# Altium PCB BUCK_PCB.PcbDoc
Units mm, origin at the board's own origin, x right, y up, seen from the top; angles counter-clockwise.
Board outline 37.2 x 20.8 mm, 2 copper layers (Top Layer, Bottom Layer); 14 components, 8 nets, 34 pads, 5 vias.
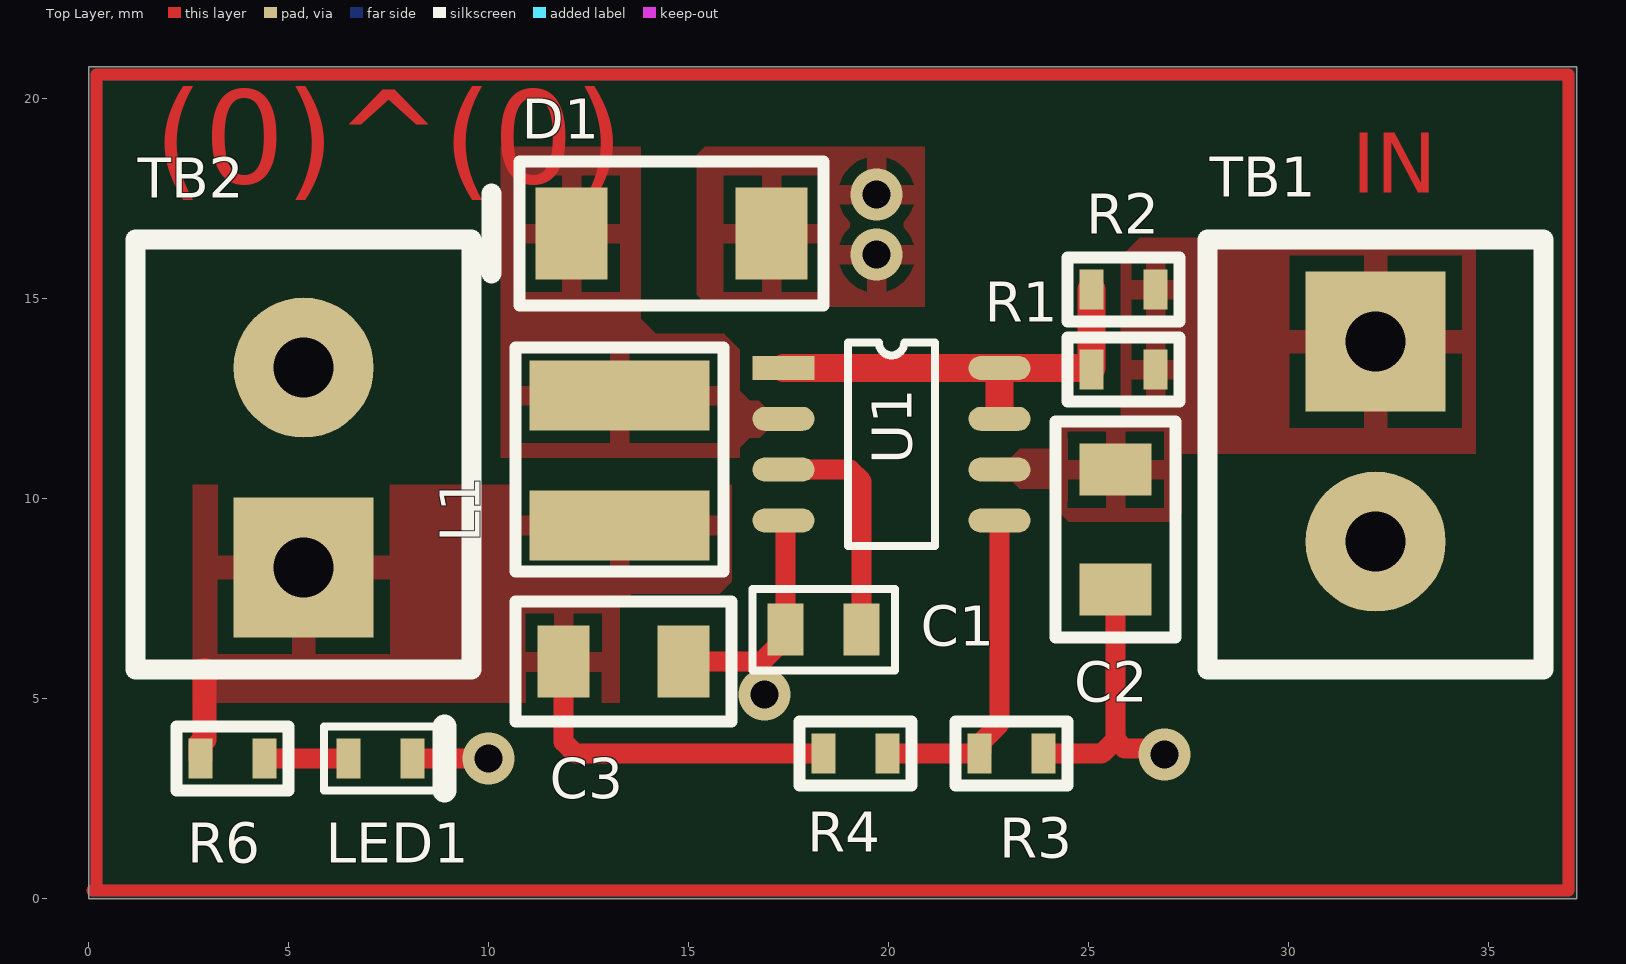
[diagram p0: Top Layer view]
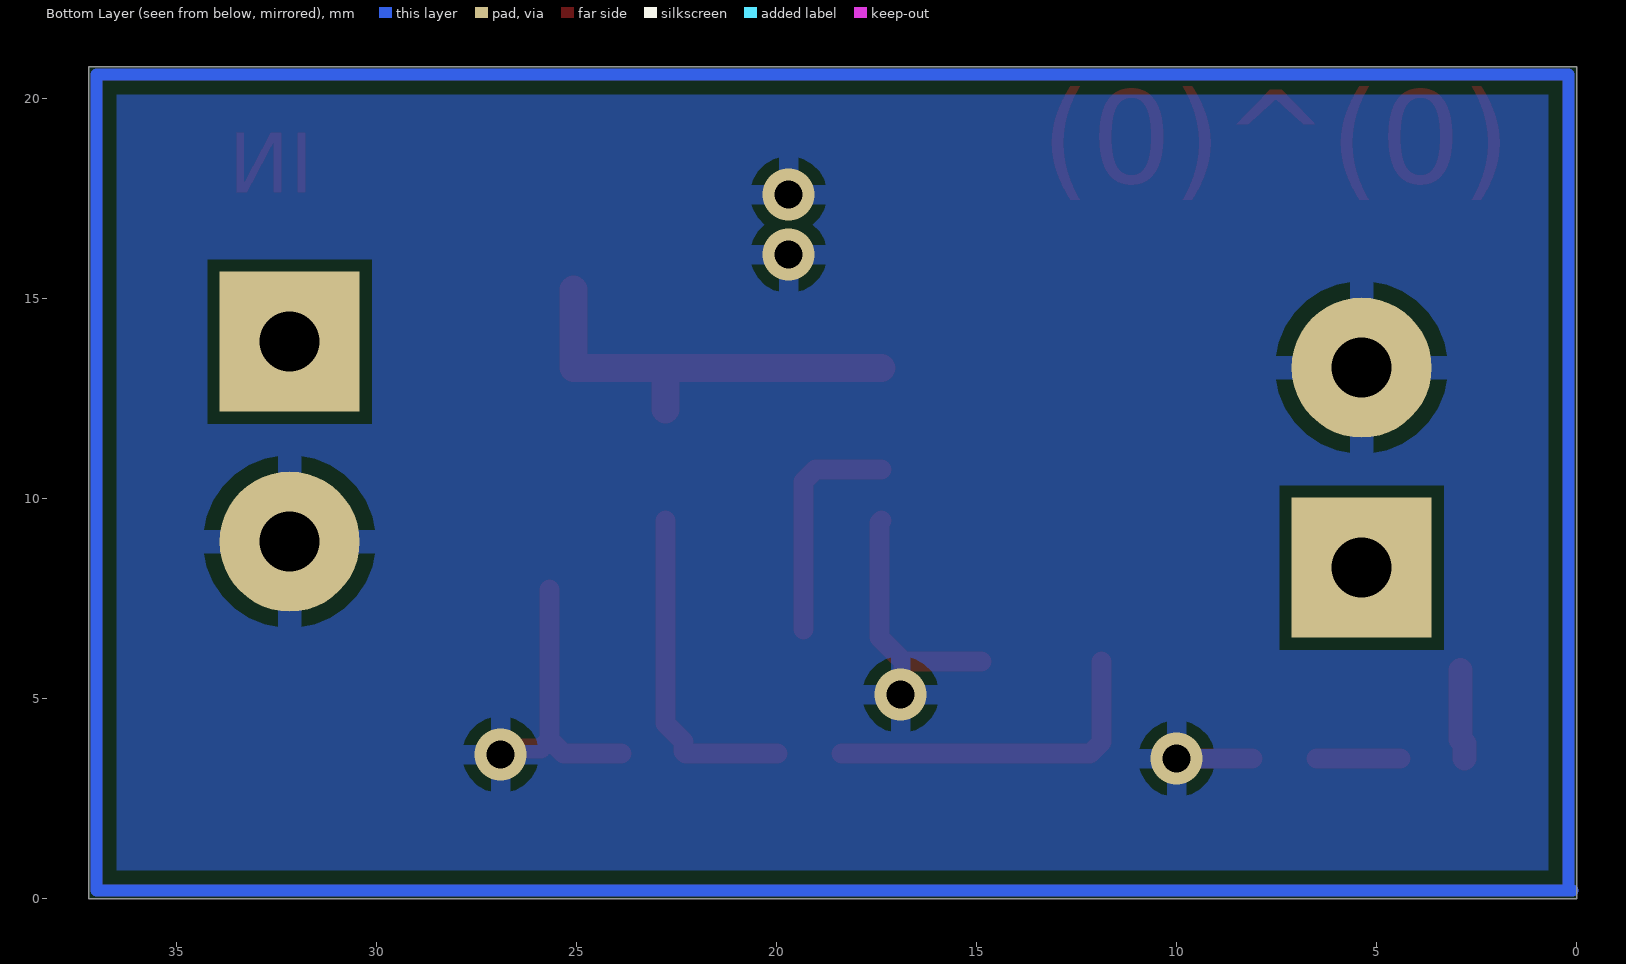
[diagram p1: Bottom Layer view, seen from below]
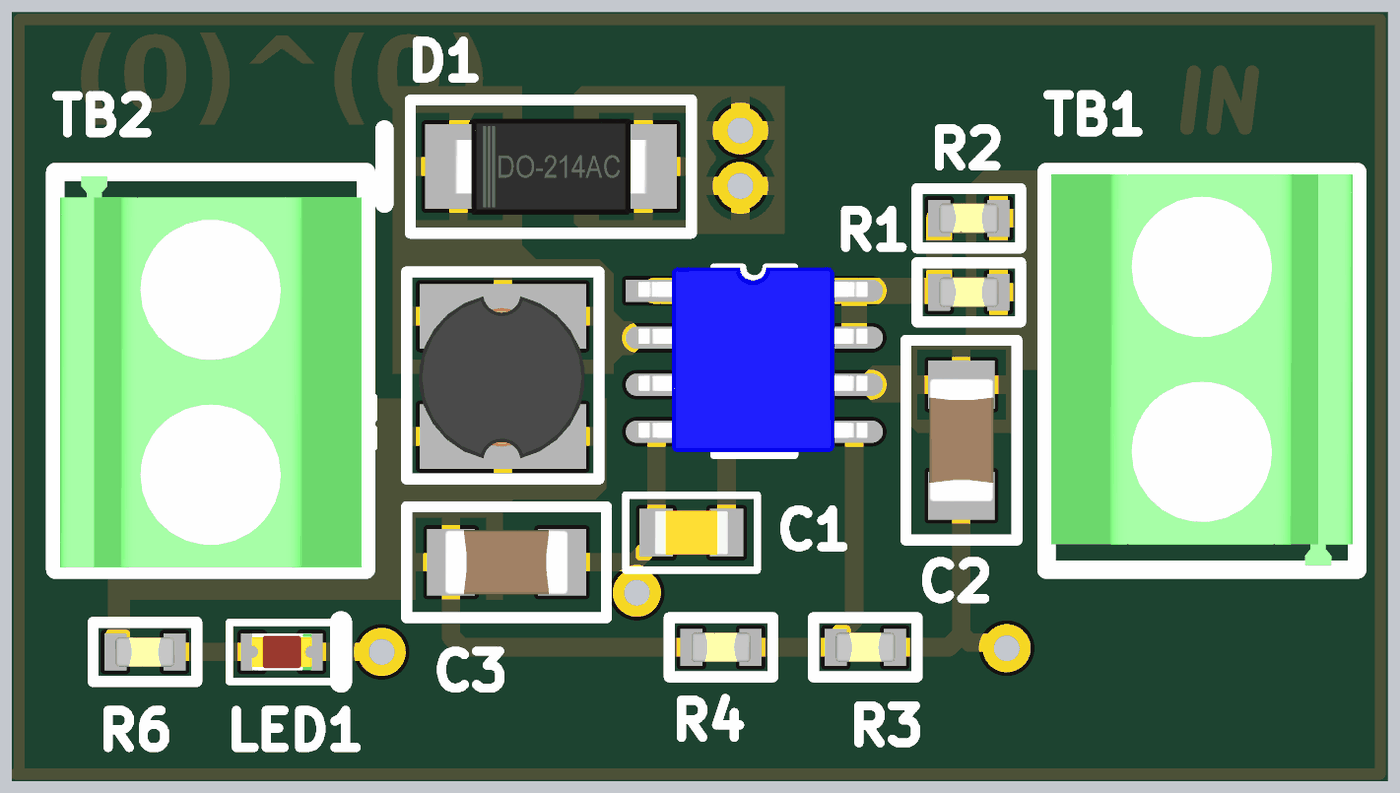
[diagram p2: 3D render of the assembled board from above, using the file's embedded part models]

## Layer stack, top to bottom
Top Solder: solder mask 0.0102, Solder Resist, Dk 3.5
Top Layer: signal copper 0.0356
Dielectric 1: dielectric 0.32, FR-4, Dk 4.8
Bottom Layer: signal copper 0.0356
Bottom Solder: solder mask 0.0102, Solder Resist, Dk 3.5

## Board outline
0,0 37.2,0 37.2,20.8 0,20.8

## Design rules (kind name [scope] priority, off if disabled: settings)
BoardOutlineClearance [All] p1: gap=0.7 ignorepadtopadclearanceinfootprint=FALSE
Clearance [All] p1: gap=0.3 ignorepadtopadclearanceinfootprint=FALSE
PolygonConnect [All] p1: thpad.connectstyle=Relief thpad.reliefconductorwidth=0.6 thpad.reliefentries=4 thpad.polygonreliefangle="90 Angle" thpad.airgapwidth=0.4 smdpad.connectstyle=Relief smdpad.reliefconductorwidth=0.5 smdpad.reliefentries=4 smdpad.polygonreliefangle="90 Angle" smdpad.airgapwidth=0.3 via.connectstyle=Relief via.reliefconductorwidth=0.5 via.reliefentries=4 via.polygonreliefangle="90 Angle" via.airgapwidth=0.3
RoutingVias [All] p1: holewidth=0.7 width=1.3 viastyle="Through Hole" minholewidth=0.6 minwidth=1.2 maxholewidth=0.8 maxwidth=1.4
SolderMaskExpansion [All] p1: expansion=0.102 istentingtop=FALSE
Width [All] p1: maxlimit=3 minlimit=0.4 preferedwidth=0.7
30 further rules are at their usual default settings.

## Components (designator, comment, footprint, x,y, rotation, side; value= is the part's Value field where it differs from the comment)
C1 "0805_C" "C0805 - 0.1uf" 18.375,6.725 r0 top
C2 "1206_C" 1206 25.675,9.225 r90 top
C3 "1206_C" 1206 13.375,5.925 r180 top
D1 "1N5819" D0-214AC 12.075,16.625 r0 top
L1 "CD43_100uH" CD43 13.275,12.575 r180 top
LED1 "0603_Red" 0603_LED 6.5,3.5 r0 top
R1 "0603_R68" 0603_CAP 26.675,13.225 r180 top
R2 "0603_R68" 0603_CAP 26.675,15.225 r180 top
R3 "0603_R" 0603_CAP 23.875,3.625 r180 top
R4 "0603_R" 0603_CAP 19.975,3.625 r180 top
R6 "0603_R" 0603_CAP 4.4,3.5 r180 top
TB1 "TERM 1x2 5mm" Terminal_5mm 32.175,11.425 r0 top
TB2 "TERM 1x2 5mm" Terminal_5mm 5.375,10.775 r180 top
U1 "Buck Conv." SOP8 17.375,13.265 r0 top

## Footprints (in the part's own frame and the unit in brackets; to place one, negate y for a bottom-side part, rotate by r counter-clockwise, add the part's x,y. Pads: shape width x height; smd on the part's side, far side on the other; paste and mask are expansions set on the pad)
0603_CAP [mm]
  rect 0.6x1 smd: 1(0,0) 2(1.6,0)
  silkscreen extent -0.6,-0.8 2.2,0.8, body extent 0,-0.4 1.6,0.4, height 0.81
0603_LED [mm]
  rect 0.6x1 smd: 1(0,0) 2(1.6,0)
  silkscreen extent -0.62,-0.8 2.4,0.8, body extent -0.01,-0.5 1.61,0.5, height 0.98
1206 [mm]
  rect 1.3x1.8 smd: 1(-1.5,0) 2(1.5,0)
  silkscreen extent -2.7,-1.5 2.7,1.5, body extent -1.67,-0.87 1.68,0.87, height 1
"C0805 - 0.1uf" [mm]
  rect 0.9x1.3 smd: 1(-0.95,0) 2(0.95,0)
  silkscreen extent -1.78,-1.02 1.78,1.02, body extent -1,-0.6 1,0.6, height 0.96
CD43 [mm]
  rect 4.5x1.75 smd: 1(0,0) 2(0,3.25)
  silkscreen extent -2.6,-1.2 2.6,4.4, body extent -2.22,-0.54 2.28,3.84, height 3.21
D0-214AC [mm]
  rect 1.8x2.3 smd: A(5,0) K(0,0)
  silkscreen extent -2,-1.8 6.3,1.8, body extent -0.1,-1.3 5.1,1.3, height 2.31
SOP8 [mm]
  rect 1.55x0.6 smd: 1(0,0)
  oval 1.55x0.6 smd: 2(0,-1.27) 3(0,-2.54) 4(0,-3.81) 5(5.4,-3.81) 6(5.4,-2.54) 7(5.4,-1.27) 8(5.4,0)
  silkscreen extent 1.61,-4.44 3.79,0.64, body extent -0.43,-4.37 5.77,0.64, height 1.62
Terminal_5mm [mm]
  rect 3.5x3.5 hole 1.5: 1(0,2.5)
  round 3.5 hole 1.5: 2(0,-2.5)
  silkscreen extent -4.2,-5.7 4.2,5.05, body extent -4.08,-5.58 4.07,4.98, height 10.01

## Part data
C1: library part "0805 Capacitor", "0805 Capacitor"
C2 C3: library part "1206 Capacitor", "1206 Capacitor"
D1: "1N5819 SS14 SMA Schottky Barrier Diodes (SBD) 40V 550mV@1A 1A"
L1: library part "100uH 4.5x4x3.2mm"
LED1: library part 0603LED
R1 R2 R3 R4 R6: library part "0603 Resistor"
TB1 TB2: library part "Terminal BLK Green", "PHOENIX CONTACT         MKDSN 1,5/ 2             Wire-To-Board Terminal Block, 5 mm, 2 Ways, 26 AWG, 16 AWG, 1.5 mm, Screw", Color=Green, Current=10A, Current Rating=13.5A, Flammability Rating="UL94 V-0", Manufacturer 1="Phoenix Contact", Manufacturer Part Number 1=1729018, Max Supply Voltage=250V, Package Quantity=50, Supplier Part Number 1=651-1729018, Voltage=300V, Voltage Rating=400V, Approvals=UL,CSA,cULus,CB, ComponentLink1Description=https://datasheet.ciiva.com/16071/1729018-16071814.pdf?src-supplier=Onlinecomponents.com, ComponentLink1URL=https://datasheet.ciiva.com/16071/1729018-16071814.pdf?src-supplier=Onlinecomponents.com, ComponentLink2Description=https://datasheet.ciiva.com/832/1729018-832055.pdf?src-supplier=Digi-Key, ComponentLink2URL=https://datasheet.ciiva.com/832/1729018-832055.pdf?src-supplier=Digi-Key, ComponentLink3Description=https://datasheet.ciiva.com/15169/getdatasheetpartid-177860-15169643.pdf?src-supplier=Verical, ComponentLink3URL=https://datasheet.ciiva.com/15169/getdatasheetpartid-177860-15169643.pdf?src-supplier=Verical, ComponentLink4Description=https://datasheet.ciiva.com/14607/70054375-14607356.pdf?src-supplier=Allied+Electronics, ComponentLink4URL=https://datasheet.ciiva.com/14607/70054375-14607356.pdf?src-supplier=Allied+Electronics, ComponentLink5Description=https://datasheet.ciiva.com/33105/1729018-33105978.pdf?src-supplier=Today+Components, ComponentLink5URL=https://datasheet.ciiva.com/33105/1729018-33105978.pdf?src-supplier=Today+Components, Connector Type=Screw, Contact Material=Tin, Depth=8.1mm, Gender=Male, Height=13.5mm, Housing Color=Green, Housing Material=Polyamide, Insulation Material=Nylon, Lead Free="Lead Free", Length=8.1mm, Material=Polyamide, Max Current Rating=13.5A, Mount="Through Hole", Number of Circuits=2, Number of Contacts=2, Number of Levels=1, Number of Pins=2, Number of Poles=2, Number of Positions=2, Number of Positions Per Level=2, Number of Rows=1, Orientation=Straight, Parameter Name 1=Bulk, Pitch=5mm, Pricing 1="1=1.10000, 10=1.05000, 50=1.01000, 100=0.97400, 250=0.91000, 500=0.83800 (USD)", Radiation Hardening=No, REACH SVHC=Unknown, RoHS=Yes, Stock 1=6371, Stripping Length=6mm, Supplier 1=Mouser, Termination=Screw, Weight=0.06949oz, Width=13.5mm, Wire Gauge (Max)=26AWG, Wire Gauge (Min)=26AWG, Wire/Cable Gauge=26AWG
U1: library part MC33063A

## Via types
v1: diameter 1.3, hole 0.7, Top Layer to Bottom Layer, 5 vias

## Nets (pads, with @x,y where several pads share a name; then routed paths per layer and width w, separated by ;. In a path a pad name is that pad's centre, name@x,y a point inside that pad or via, vN(x,y) a via of type N, cw(c..) or ccw(c..) an arc to the next point about the centre after c; other vN are vias at no path point)
Collector: R1.2 R2.2 U1.1 U1.7 U1.8 | length 10.7
  Top Layer w0.7: U1.1 U1.8 ; U1.7@22.775,12.225 U1.8 ; R2.2 25.075,13.265 U1.8
FB: R3.2 R4.1 U1.5 | length 8.3
  Top Layer w0.5: R4.1 R3.2 22.325,3.675 22.325,3.925 22.775,4.375 U1.5
GND: C1.1 C2.1 C3.1 D1.A LED1.2 R3.1 TB1.2 TB2.2 U1.4 | length 15.6
  Top Layer w0.5: LED1.2 v1(10,3.5) ; C3.1 16.825,5.925 ; v1(16.9,5.1) 16.825,5.175 16.825,5.925 ; U1.4 17.379,9.455 17.425,9.409 C1.1 17.425,6.525 16.825,5.925 ; R3.1 25.325,3.625 25.675,3.975 ; C2.1 25.675,3.975 ; v1(26.9,3.6) 26.747,3.753 25.897,3.753 25.675,3.975
  other v1: 19.7,16.1 19.7,17.6
NetLED1_1: LED1.1 R6.1 | length 2.1
  Top Layer w0.5: R6.1 LED1.1
SW: D1.K L1.1 U1.2
Tc: C1.2 U1.3 | length 5.8
  Top Layer w0.5: U1.3 19.032,10.725 19.325,10.432 C1.2
V_OUT: C3.2 L1.2 R4.2 R6.2 TB2.1 | length 10.9
  Top Layer w0.5: C3.2 11.875,3.918 12.168,3.625 R4.2
  Top Layer w0.6: R6.2 2.8,3.876 2.897,3.973 2.897,5.715
VCC: C2.2 R1.1 R2.1 TB1.1 U1.6
copper on no net: | length 229
  Top Layer w0.3: 0.1,0.2 37,0.2 37,20.6 0.2,20.6 0.2,0.2
  Bottom Layer w0.3: 0.1,0.2 37,0.2 37,20.6 0.2,20.6 0.2,0.2

## Polygon pours and split planes (outlines as drawn)
GND on Top Layer "GND_L01_P012" (solid, pour order 12): 15.4,18.8 15.2,18.6 15.2,15.1 15.5,14.8 20.9,14.8 20.9,18.8
VCC on Top Layer "VCC_L01_P010" (solid, pour order 10): 24.3,9.95 23.825,10.425 23.825,10.625 24.575,10.625 24.575,9.95
VCC on Top Layer "VCC_L01_P009" (solid, pour order 9): 24.3,11.5 23.825,11.025 23.825,10.825 24.575,10.825 24.575,11.5
VCC on Top Layer "VCC_L01_P008" (solid, pour order 8): 22.775,11.025 23.05,11.025 23.275,11.25 24.3,11.25 24.3,10.25 23.275,10.25 23.1,10.425 22.775,10.425
SW on Top Layer "Top Layer-SW" (solid, pour order 6): 16.525,11.525 16.775,11.525 17.075,11.825 17.075,12.125 16.75,12.45 16.525,12.45 16.275,12.7 16.275,13.725 15.875,14.125 14.175,14.125 13.8,14.5 13.8,18.8 10.3,18.8 10.3,11.025 16.275,11.025 16.275,11.275
VCC on Top Layer "VCC_L01_P002" (solid, pour order 2): 34.675,16.525 34.675,11.125 27.325,11.125 27.325,9.65 27.1,9.425 24.5,9.425 24.19,9.735 24.19,11.64 24.45,11.9 25.65,11.9 25.8,12.05 25.8,16.05 26.275,16.525
V_OUT on Top Layer "V_OUT_L01_P001" (solid, pour order 1): 2.6,10.35 2.6,4.9 13.275,4.9 13.275,7.325 13.575,7.625 15.775,7.625 16.075,7.925 16.075,10.35
GND on Bottom Layer "GND_L02_P011" (solid, pour order 11): -2.6,-1.7 39.9,-1.7 39.9,20.8 -2.6,20.8

## Other copper
Top Layer:
  text "IN" at 31.575,17.65 h1.5
  text "(0)^(0)" at 1.629,17.127 h4